# EAGLE board steering_throttle (EAGLE 6.6.0)
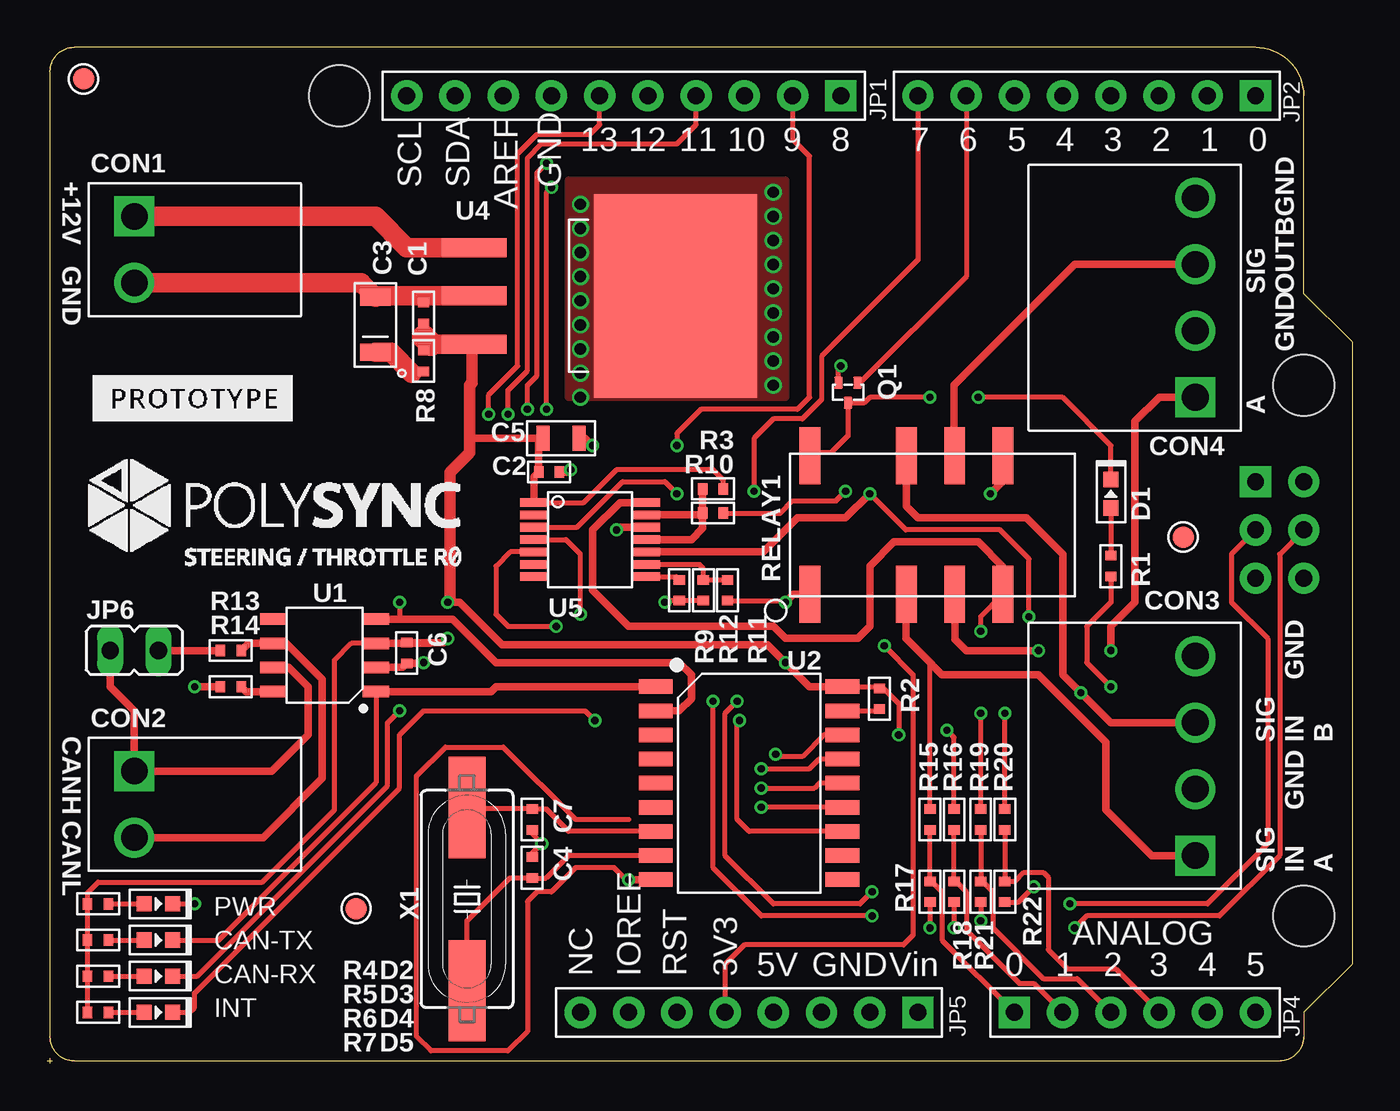
[diagram p0: board, top side]
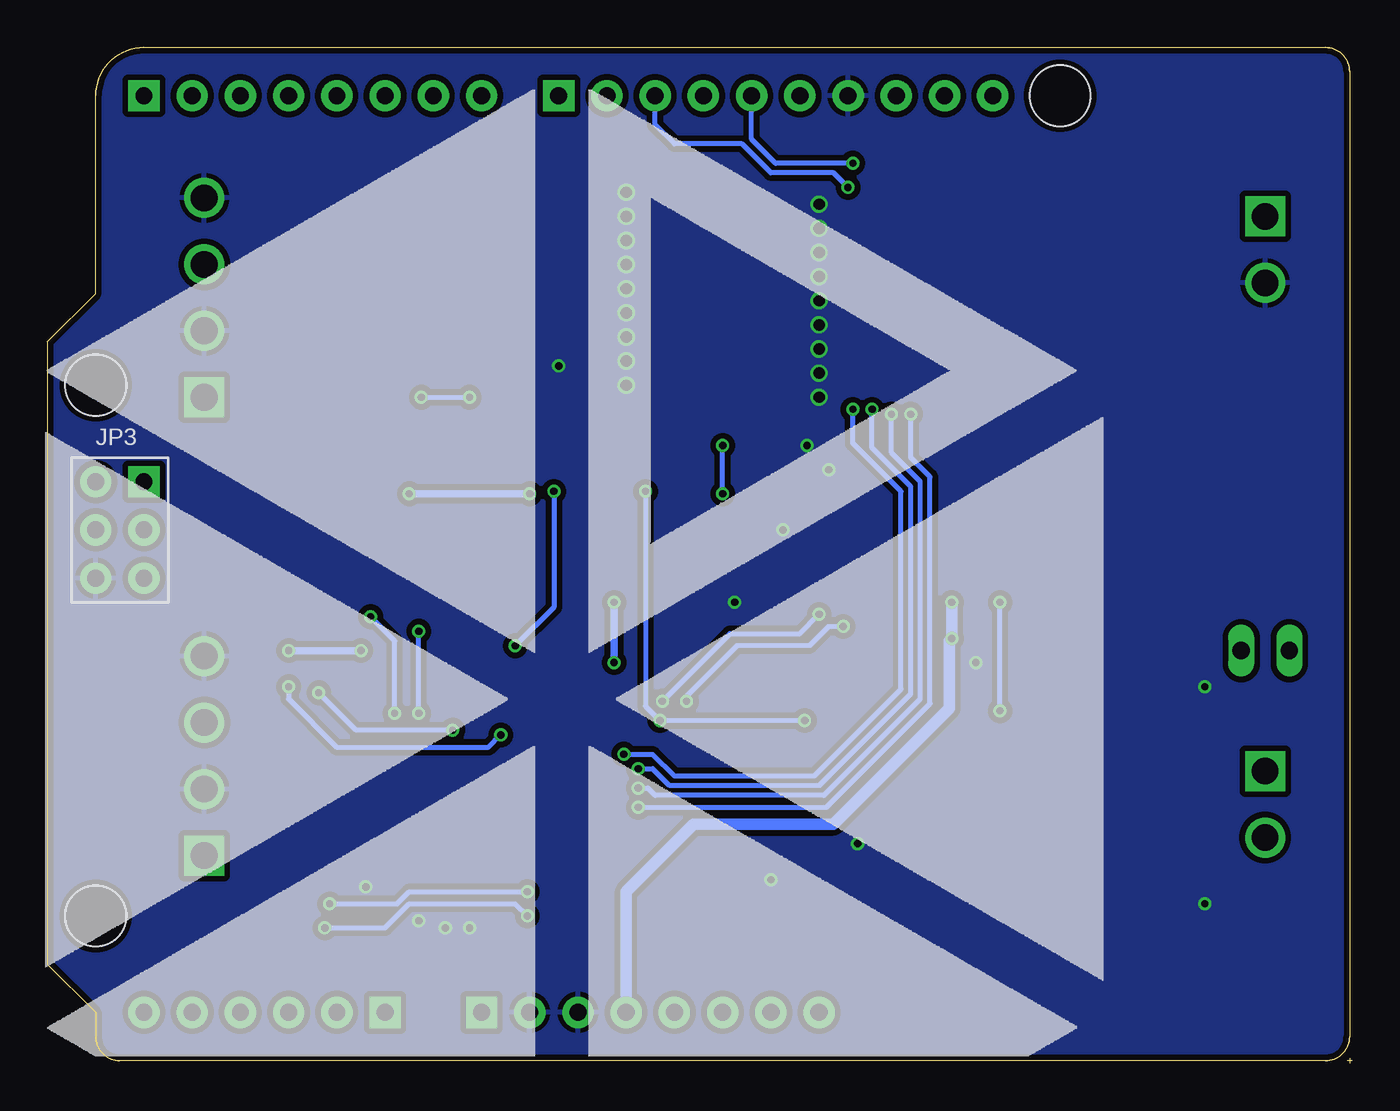
[diagram p1: board, bottom side, seen from below]

Size 68.71 x 53.47 mm. Coordinates in mm from the lower left corner, seen from the top.
Outline: 66.17,1.4 arc-90 64.9,0.13
Outline: 1.4,0.13 arc-90 0.13,1.4
Outline: 0.13,52.2 arc-90 1.4,53.47
Outline: 63.63,53.47 arc-90 66.17,50.93
Outline: 0.13,1.4 arc90 1.4,0.13
Outline: 64.9,0.13 arc90 66.17,1.4
Outline: 1.4,53.47 arc90 0.13,52.2
Outline: 0.13,1.4 arc90 1.4,0.13
Outline: 64.9,0.13 arc90 66.17,1.4
Outline: 66.17,50.93 arc90 63.63,53.47
Outline: 66.17,1.4 66.17,2.67 68.71,5.21 68.71,37.97 66.17,40.51 66.17,50.93
Outline: 66.17,1.4 arc-90 64.9,0.13
Outline: 63.63,53.47 5.21,53.47 1.4,53.47
Outline: 1.4,53.47 arc90 0.13,52.2
Outline: 0.13,52.2 0.13,1.4
Outline: 0.13,1.4 arc90 1.4,0.13
Outline: 66.17,50.93 arc90 63.63,53.47
Outline: 1.4,0.13 64.9,0.13
Outline: 0,0.13 0.25,0.13
Outline: 0.13,0.25 0.13,0
Copper layers (1*16): Top 0.035mm / dielectric 1.5mm / Bottom 0.035mm
Design rules "MF_Standard_2_Layer": minimum track width 6mil, minimum drill 12mil, track to track 6mil, track to pad 6mil, pad to pad 6mil, via to via 6mil, smd to smd 0mil, copper to edge 10mil, drill to drill 10mil, minimum pad ring 6mil, minimum via ring 6mil, stop-mask expansion 2mil, vias tented up to drill 25mil, thermal gap 10mil
Net classes: 0 default: width 0.152 mm, drill 0.305 mm, clearance 0.152 mm

## Footprints (pad centres in the part's own frame; a part is rotated, then mirrored left to right if it is on the bottom)
C0402 = smd 0.5 x 0.6: P$1 -0.55,0; P$2 0.55,0
CP1206 = smd 0.9 x 1.6: P$1 -1.45,0; P$2 1.45,0
C0805 = smd 0.7 x 1.3: P$1 -0.95,0; P$2 0.95,0
PHOENIX_2_45 = drill 1.4 square: P$1 0,0 | drill 1.4: P$2 3.5,0
PHOENIX_4_45 = drill 1.4 square: P$1 0,0 | drill 1.4: P$2 3.5,0; P$3 7,0; P$4 10.5,0
LED0603 = smd 0.8 x 0.8: ANODE 0.75,0; CATHODE -0.75,0
ARDUINO_JP1 = drill 0.889 pad 1.651 square: 9 41.656,50.8 | drill 0.889 pad 1.651: 10 39.116,50.8; 11 36.576,50.8; 12 34.036,50.8; 13 31.496,50.8; 14 28.956,50.8; 15 26.416,50.8; 16 23.876,50.8; 17 21.336,50.8; 18 18.796,50.8 | hole 3.2: 15.24,50.8
ARDUINO_JP2 = drill 0.889 pad 1.651 square: 1 63.5,50.8 | drill 0.889 pad 1.651: 2 60.96,50.8; 3 58.42,50.8; 4 55.88,50.8; 5 53.34,50.8; 6 50.8,50.8; 7 48.26,50.8; 8 45.72,50.8
ARDUINO_JP3 = drill 0.889 pad 1.651 square: 33 63.5,30.48 | drill 0.889 pad 1.651: 34 63.5,27.94; 35 63.5,25.4; 36 66.04,25.4; 37 66.04,27.94; 38 66.04,30.48 | hole 3.2: 66.04,35.56; 66.04,7.62
ARDUINO_JP4 = drill 0.889 pad 1.651 square: 27 50.8,2.54 | drill 0.889 pad 1.651: 28 53.34,2.54; 29 55.88,2.54; 30 58.42,2.54; 31 60.96,2.54; 32 63.5,2.54
ARDUINO_JP5 = drill 0.889 pad 1.651: 19 27.94,2.54; 20 30.48,2.54; 21 33.02,2.54; 22 35.56,2.54; 23 38.1,2.54; 24 40.64,2.54; 25 43.18,2.54 | drill 0.889 pad 1.651 square: 26 45.72,2.54
JP1 = drill 0.914 long: 1 0,-1.27; 2 0,1.27
EMT3F = smd 0.46 x 0.65: P$1 -0.5,0; P$2 0.5,0; P$3 0,1.05
R0402 = smd 0.5 x 0.6: P$1 -0.55,0; P$2 0.55,0
KEMET_EE2 = smd 1.1 x 3: P$1 -6.45,-3.645; P$3 -1.37,-3.645; P$4 1.17,-3.645; P$5 3.71,-3.645; P$8 3.71,3.645; P$9 1.17,3.645; P$10 -1.37,3.645; P$12 -6.45,3.645
TP_4545 = smd 1.143 x 1.143: T 0,0
SOIC8-6.0 = smd 0.6 x 1.4: 1 -1.905,-2.7; 2 -0.635,-2.7; 3 0.635,-2.7; 4 1.905,-2.7; 5 1.905,2.7; 6 0.635,2.7; 7 -0.635,2.7; 8 -1.905,2.7
SOIC18 = smd 0.762 x 1.778: 1 -5.08,-4.915; 2 -3.81,-4.915; 3 -2.54,-4.915; 4 -1.27,-4.915; 5 0,-4.915; 6 1.27,-4.915; 7 2.54,-4.915; 8 3.81,-4.915; 9 5.08,-4.915; 10 5.08,4.915; 11 3.81,4.915; 12 2.54,4.915; 13 1.27,4.915; 14 0,4.915; 15 -1.27,4.915; 16 -2.54,4.915; 17 -3.81,4.915; 18 -5.08,4.915
TO-263 = smd 1 x 3.4: P$1 -2.54,0; P$2 0,0; P$3 2.54,0 | smd 10.7 x 8.6: P$4 0,10.6
TSSOP-14 = smd 1.45 x 0.45: P$1 -2.95,1.95; P$2 -2.95,1.3; P$3 -2.95,0.65; P$4 -2.95,0; P$5 -2.95,-0.65; P$6 -2.95,-1.3; P$7 -2.95,-1.95; P$8 2.95,-1.95; P$9 2.95,-1.3; P$10 2.95,-0.65; P$11 2.95,0; P$12 2.95,0.65; P$13 2.95,1.3; P$14 2.95,1.95
HC49UP = smd 5.334 x 1.93: 1 -4.826,0; 2 4.826,0

## Placement (x,y rotation side)
C1  .1u  [C0402]  19.81,39.5 90 top
C2  .1u  [C0402]  26.42,31.11 0 top
C3  33u  [CP1206]  17.27,38.86 90 top
C4  22p  [C0402]  25.53,10.29 270 top
C5  10u  [C0805]  27.05,32.89 0 top
C6  .1u  [C0402]  18.92,21.59 270 top
C7  22p  [C0402]  25.53,12.83 90 top
CON1  CON2  [PHOENIX_2_45]  4.57,44.58 270 top
CON2  CON2  [PHOENIX_2_45]  4.57,15.37 270 top
CON3  CON4  [PHOENIX_4_45]  60.45,10.92 90 top
CON4  CON4  [PHOENIX_4_45]  60.45,35.05 90 top
D1  [LED0603]  56.01,29.97 270 top
D2  [LED0603]  5.84,8.38 180 top
D3  [LED0603]  5.84,6.48 180 top
D4  [LED0603]  5.84,4.57 180 top
D5  [LED0603]  5.84,2.67 180 top
JP1  ARDUINO_JP1  [ARDUINO_JP1]  0.13,0.13 0 top
JP2  ARDUINO_JP2  [ARDUINO_JP2]  0.13,0.13 0 top
JP3  ARDUINO_JP3  [ARDUINO_JP3]  0.13,0.13 0 top
JP4  ARDUINO_JP4  [ARDUINO_JP4]  0.13,0.13 0 top
JP5  ARDUINO_JP5  [ARDUINO_JP5]  0.13,0.13 0 top
JP6  [JP1]  4.57,21.72 270 top
Q1  RE1C002UN  [EMT3F]  42.16,35.81 180 top
R1  1k  [R0402]  56.01,26.16 270 top
R2  10k  [R0402]  43.82,19.18 270 top
R3  0  [R0402]  35.05,30.23 180 top
R4  1k  [R0402]  2.67,8.38 180 top
R5  1k  [R0402]  2.67,6.48 180 top
R6  1k  [R0402]  2.67,4.57 180 top
R7  1k  [R0402]  2.67,2.67 180 top
R8  .3  [R0402]  19.81,36.96 270 top
R9  10k  [R0402]  33.27,24.89 270 top
R10  DNP  [R0402]  35.05,28.96 180 top
R11  10k  [R0402]  35.81,24.89 90 top
R12  DNP  [R0402]  34.54,24.89 270 top
R13  120  [R0402]  9.65,21.72 180 top
R14  47k  [R0402]  9.65,19.81 180 top
R15  0  [R0402]  46.48,12.83 270 top
R16  0  [R0402]  47.75,12.83 270 top
R17  DNP  [R0402]  46.48,9.02 270 top
R18  DNP  [R0402]  47.75,9.02 270 top
R19  0  [R0402]  49.15,12.83 270 top
R20  0  [R0402]  50.42,12.83 270 top
R21  DNP  [R0402]  49.15,9.02 270 top
R22  DNP  [R0402]  50.42,9.02 270 top
RELAY1  RELAY_DPDT  [KEMET_EE2]  46.61,28.32 0 top
TP1  [TP_4545]  16.26,8.13 0 top
TP2  [TP_4545]  59.82,27.69 0 top
TP3  [TP_4545]  1.91,51.82 0 top
U1  MCP2551  [SOIC8-6.0]  14.61,21.46 90 top
U2  MCP2515  [SOIC18]  36.96,14.73 270 top
U4  TL750M  [TO-263]  22.48,40.39 270 top
U5  MCP4922T  [TSSOP-14]  28.57,27.56 0 top
U$1  [POLYSYNC_STEERING_BOT]  0.64,0.38 0 top
U$2  [POLYSYNC_STEERING_TOP_R0]  -0.64,21.21 0 top
X1  16MHz  [HC49UP]  22.1,8.64 90 top

## Library data of the parts
C1 C2 C4-C7 R1-R22 = MF_Passives; POPULATE: 1
C3 = MF_Passives
CON1-CON4 U4 U5 U$1 U$2 = polysync
D1-D5 = MF_LEDs; HOUSEPART: NO; POPULATE: 1
JP1-JP5 = polysync_steering_throttle
JP6 = jumper
Q1 = BTLE_widget
RELAY1 = polysync; PARTNO: EE2-5NU-L
TP1-TP3 = Discrete; PARTNO: DNP
U1 U2 = IC
X1 = Discrete

## Nets
+3V3: JP5.22 R10.P$1
+5V: C1.P$1 C2.P$1 C5.P$1 C6.P$1 JP5.23 R1.P$2 R2.P$1 R3.P$1 R4.P$2 R5.P$2 R6.P$2 R7.P$2 R8.P$1 R11.P$1 RELAY1.P$1 U1.3 U2.18 U4.P$3 U5.P$1
ADC0: JP4.27 R15.P$2 R17.P$1
ADC1: JP4.28 R16.P$2 R18.P$1
ADC2: JP4.29 R19.P$2 R21.P$1
ADC3: JP4.30 R20.P$2 R22.P$1
ADC4: JP4.31
ADC5: JP4.32
ADC6: JP5.19
ADC7: JP5.20
CANH: CON2.P$1 JP6.1 U1.7
CANL: CON2.P$2 R13.P$1 U1.6
CS_A: JP1.10 U5.P$3
CS_B: JP1.11 U2.16
GND: C1.P$2 C2.P$2 C3.P$2 C4.P$1 C5.P$2 C6.P$2 C7.P$1 CON1.P$2 CON3.P$2 CON3.P$4 CON4.P$2 CON4.P$4 D2.CATHODE JP1.15 JP3.36 JP5.24 JP5.25 Q1.P$2 R9.P$2 R12.P$2 R14.P$2 R17.P$2 R18.P$2 R21.P$2 R22.P$2 U1.2 U2.9 U4.P$2 U4.P$4 U5.P$12
INT: D5.CATHODE JP2.8 U2.12
IO0: JP2.1
IO1: JP2.2
IO2: JP2.3
IO3: JP2.4
IO4: JP2.5
IO5: JP2.6
IO8: JP1.9
LDAC: R9.P$1 U5.P$8
MISO_A: JP3.33
MISO_B: JP1.13 U2.15
MOSI_A: JP3.37 U5.P$5
MOSI_B: JP1.12 U2.14
N$1: D3.ANODE R5.P$1
N$2: JP6.2 R13.P$2
N$3: D1.CATHODE Q1.P$3 RELAY1.P$12
N$4: C3.P$1 R8.P$2
N$5: D4.ANODE R6.P$1
N$6: D2.ANODE R4.P$1
N$7: R3.P$2 R10.P$2 U5.P$11 U5.P$13
N$8: D5.ANODE R7.P$1
N$9: R14.P$1 U1.8
N$10: D1.ANODE R1.P$1
N$16: C7.P$2 U2.7 X1.2
N$17: C4.P$2 U2.8 X1.1
REF: JP1.16
RST: JP5.21
RST_N: R2.P$2 U2.17
RX_CAN: D4.CATHODE U1.4 U2.2
SCK_A: JP3.34 U5.P$4
SCK_B: JP1.14 U2.13
SHDN: R11.P$2 R12.P$1 U5.P$9
SIGNAL_INPUT_A: CON3.P$1 R15.P$1 RELAY1.P$3
SIGNAL_INPUT_B: CON3.P$3 R16.P$1 RELAY1.P$10
SIGNAL_OUTPUT_A: CON4.P$1 RELAY1.P$4
SIGNAL_OUTPUT_B: CON4.P$3 RELAY1.P$9
SPOOF_EN: JP2.7 Q1.P$1
SPOOF_SIGNAL_A: R19.P$1 RELAY1.P$5 U5.P$14
SPOOF_SIGNAL_B: R20.P$1 RELAY1.P$8 U5.P$10
TX_CAN: D3.CATHODE U1.1 U2.1
V+: CON1.P$1 U4.P$1
VIN: JP5.26

## Tracks (layer width: path | path; a pad name or v marks a point on that pad's centre or on a via)
+3V3  (via drill 0.38)
  Top 0.254: R10.P$1 38.61,28.96 39.24,29.59 41.53,29.59 v42.04,30.1 | v44.07,21.97 45.59,20.45 45.59,6.73 45.09,6.22 36.7,6.22 35.69,5.21 JP5.22
  Bottom 0.254: v42.04,30.1 42.04,24 v44.07,21.97
+5V  (via drill 0.38)
  Top 0.254: C1.P$1 19.81,38.23 | R8.P$1 19.85,37.51 20.19,37.85 | U2.18 43.73,19.81 R2.P$1 44.03,19.73 44.83,18.92 v44.83,17.27 | R7.P$2 R6.P$2 R5.P$2 R4.P$2 2.12,8.98 2.67,9.53 11.3,9.53 15.11,13.34 15.11,21.21 16,22.1 U1.3 | R1.P$2 56.01,24.26 54.74,22.99 54.74,21.08 v56.01,19.81 | R3.P$1 35.6,30.69 35.05,31.24 29.97,31.24 28.24,29.51 U5.P$1 | R11.P$1 38.78,24.34 v38.86,24.26
  Top 0.406: U1.3 20.15,22.1 C6.P$1 20.87,22.14 v21.08,22.35 | 22.35,37.72 U4.P$3 | 22.22,32.89 C5.P$1 25.87,32.66 C2.P$1 25.62,30.87 U5.P$1 | v21.08,24.26 21.72,24.26 23.94,22.03 37.91,22.03 v38.86,21.08 40.13,19.81 U2.18 | RELAY1.P$1 39.28,24.68 v38.86,24.26
  Top 0.61: 22.35,37.72 22.35,35.81 22.22,35.69 22.22,32.89 22.22,32.13 21.21,31.11 21.21,24.38 v21.08,24.26
  Top 1.016: U4.P$3 20.19,37.85
  Top 1.27: 20.19,37.85 19.81,38.23
  Bottom 0.254: v56.01,19.81 56.01,19.18 53.47,16.64 45.47,16.64 v44.83,17.27
  Bottom 0.406: v38.86,24.26 v38.86,21.08
  Bottom 0.61: JP5.23 38.23,9.02 34.67,12.57 27.3,12.57 21.21,18.67 21.21,22.22 v21.08,22.35 v21.08,24.26
ADC0
  Top 0.254: R15.P$2 R17.P$1 46.57,9.57 47.12,9.02 47.12,6.48 JP4.27
ADC1
  Top 0.254: R16.P$2 R18.P$1 47.84,9.57 48.39,9.02 48.39,6.98 51.18,4.19 51.94,4.19 JP4.28
ADC2
  Top 0.254: JP4.29 54.23,4.44 52.45,4.44 49.78,7.11 49.78,9.02 49.23,9.57 R21.P$1 R19.P$2
ADC3
  Top 0.254: R20.P$2 R22.P$1 50.97,9.57 51.44,10.03 52.45,10.03 52.71,9.78 52.71,5.97 53.72,4.95 56.26,4.95 JP4.30
CANH
  Top 0.406: U1.7 12.7,20.83 13.72,19.81 13.72,17.27 11.81,15.37 CON2.P$1 4.57,18.54 3.3,19.81 JP6.1
CANL
  Top 0.406: CON2.P$2 11.36,11.87 14.48,14.99 14.48,20.19 12.57,22.1 U1.6 10.58,22.1 R13.P$1
CS_A  (via drill 0.38)
  Top 0.254: U5.P$3 27.89,28.21 30.29,30.61 32.51,30.61 v33.15,29.97 | JP1.10 39.24,48.64 40.13,47.75 40.13,35.05 39.5,34.42 34.42,34.42 33.15,33.15 v33.15,32.51
  Bottom 0.254: v33.15,29.97 v33.15,32.51
CS_B  (via drill 0.38)
  Top 0.254: v26.29,34.42 26.29,45.85 v26.54,46.1 | U2.16 40.89,17.27 39.75,16.13 38.48,16.13 v38.35,16.26
  Bottom 0.254: v38.35,16.26 36.83,16.26 35.69,15.11 28.32,15.11 23.75,19.68 23.75,30.1 26.29,32.64 v26.29,34.42 | v26.54,46.1 27.3,46.86 30.61,46.86 32.13,48.39 35.69,48.39 36.7,49.4 JP1.11
GND  (via drill 0.38, 0.6)
  Top 0.254: C1.P$2 19.81,40.39 | D2.CATHODE v7.75,8.38 | v32.51,24.26 32.6,24.34 R9.P$2 R12.P$2 | R18.P$2 v47.75,7.11 | R17.P$2 v46.48,7.11 | 19.77,21.04 v19.81,21.08 | C7.P$1 25.53,12.07 v26.04,11.56 25.53,11.05 C4.P$1 | v30.61,9.65 30.48,9.65 29.84,10.29 27.81,10.29 26.54,9.02 25.78,9.02 25.27,8.51 25.27,1.65 24.26,0.64 20.19,0.64 19.43,1.4 19.43,15.11 20.95,16.64 24,16.64 27.81,12.83 30.61,12.83 | Q1.P$2 41.66,36.58 v41.78,36.7 | R21.P$2 v49.15,7.49 | R22.P$2 51.14,8.47 v51.94,9.27
  Top 0.406: R14.P$2 v7.75,19.81 | 19.77,21.04 C6.P$2 18.71,20.83 U1.2 | U2.9 v30.61,9.65 | U5.P$12 30.11,28.21 v29.97,28.07 | C2.P$2 27.43,31.11 v27.56,31.24 | C5.P$2 28.32,32.89 v28.7,32.51
  Top 1.016: CON1.P$2 16.51,41.08 C3.P$2 17.35,40.39 19.81,40.39 U4.P$2
  other vias: 38.23,44.58 38.23,43.31 38.23,42.04 38.23,40.77 38.23,39.5 38.23,38.23 38.23,36.96 38.23,35.69 28.07,45.21 28.07,43.94 28.07,42.67 28.07,41.4 28.07,40.13 28.07,38.86 28.07,37.59 28.07,36.32 28.07,35.05 38.23,45.85
  pour Bottom (isolate 0.305): 0.13,53.47 0.13,0.13 68.71,0.13 68.71,53.47
  pour Top (no thermals): 27.43,46.48 27.43,35.05 38.86,35.05 38.86,46.48
INT  (via drill 0.38)
  Top 0.254: U2.12 36.96,12.19 36.32,12.83 36.32,17.91 v36.45,18.03 | v28.83,18.03 28.32,18.54 19.81,18.54 18.54,17.27 18.54,14.48 7.75,3.68 7.75,2.92 7.49,2.67 D5.CATHODE | JP2.8 45.85,42.29 40.77,37.21 40.77,34.93 39.75,33.91 38.23,33.91 37.21,32.89 v37.21,30.1
  Bottom 0.254: v28.83,18.03 v36.45,18.03 37.21,18.8 v37.21,30.1
LDAC
  Top 0.254: U5.P$8 33.11,25.61 R9.P$1
MISO_B  (via drill 0.38)
  Top 0.254: v37.59,15.49 40.13,15.49 40.64,16 U2.15 | v25.27,34.42 25.27,35.69 25.78,36.2 25.78,46.86 v26.29,47.37
  Bottom 0.254: v25.27,34.42 25.27,32.39 23.24,30.35 23.24,19.43 28.07,14.61 35.94,14.61 36.83,15.49 v37.59,15.49 | v26.29,47.37 30.35,47.37 31.62,48.64 JP1.13
MOSI_A  (via drill 0.38)
  Top 0.254: JP3.37 64.9,26.8 64.9,10.92 61.72,7.75 54.74,7.75 v54.1,7.11 | v43.43,7.75 37.59,7.75 35.05,10.29 v35.05,19.05 | U5.P$5 24.37,26.91 23.62,26.16 23.62,23.62 24.26,22.99 v26.8,22.99
  Bottom 0.254: v54.1,7.11 50.93,7.11 49.66,8.38 44.07,8.38 v43.43,7.75 | v26.8,22.99 27.56,22.99 28.57,21.97 32.39,21.97 35.05,19.3 v35.05,19.05
MOSI_B  (via drill 0.38)
  Top 0.254: v37.59,14.48 40.39,14.48 40.64,14.73 U2.14 | v24.26,34.16 24.26,35.43 25.27,36.45 25.27,47.62 26.04,48.39 33.15,48.39 34.16,49.4 JP1.12
  Bottom 0.254: v24.26,34.16 24.26,32.13 22.73,30.61 22.73,19.18 27.81,14.1 36.7,14.1 37.08,14.48 v37.59,14.48
N$1
  Top 0.254: R5.P$1 D3.ANODE
N$2
  Top 0.406: R13.P$2 JP6.2
N$3  (via drill 0.38)
  Top 0.254: 40.39,32.19 RELAY1.P$12 40.32,32.13 41.28,32.13 42.16,33.02 Q1.P$3 43.02,34.76 43.31,35.05 v46.48,35.05 | D1.CATHODE 56.01,32.51 53.47,35.05 v49.02,35.05
  Bottom 0.254: v49.02,35.05 v46.48,35.05
N$4
  Top 0.254: 19.18,36.32 19.73,36.32 R8.P$2
  Top 1.016: C3.P$1 18.09,37.41 19.18,36.32
N$5
  Top 0.254: R6.P$1 D4.ANODE
N$6
  Top 0.254: R4.P$1 D2.ANODE
N$7
  Top 0.406: U5.P$13 34.41,28.86 R10.P$2 | R10.P$2 R3.P$2 | U5.P$11 33.91,27.56 34.5,28.15 R10.P$2
N$8
  Top 0.254: R7.P$1 D5.ANODE
N$9
  Top 0.406: U1.8 10.46,19.56 R14.P$1
N$10
  Top 0.254: D1.ANODE R1.P$1
N$16
  Top 0.254: U2.7 27.43,12.19 26.25,13.38 C7.P$2 22.18,13.38 X1.2
N$17
  Top 0.254: U2.8 27.43,10.92 26.25,9.74 C4.P$2 24.34,9.74 22.1,7.49 X1.1
RST_N
  Top 0.254: U2.17 43.73,18.54 R2.P$2
RX_CAN  (via drill 0.38)
  Top 0.254: v18.54,18.54 17.91,17.91 17.91,14.61 7.87,4.57 D4.CATHODE | v18.54,24.26 18.54,23.37
  Top 0.406: U2.2 33.27,18.54 33.91,19.18 33.91,20.45 33.27,21.08 23.62,21.08 21.34,23.37 18.54,23.37 U1.4
  Bottom 0.254: v18.54,18.54 v18.54,24.26
SCK_A  (via drill 0.38)
  Top 0.254: JP3.34 62.36,26.8 62.36,24.26 64.26,22.35 64.26,11.56 61.09,8.38 v53.85,8.38 | v43.43,9.02 42.8,8.38 38.23,8.38 35.69,10.92 35.69,18.41 v36.32,19.05 | U5.P$4 27.3,27.56 28.07,26.8 v28.07,23.62
  Bottom 0.254: v53.85,8.38 50.29,8.38 49.66,9.02 v43.43,9.02 | v28.07,23.62 29.08,22.61 32.77,22.61 v36.32,19.05
SCK_B  (via drill 0.38)
  Top 0.254: U2.13 v37.59,13.46 | v23.24,34.16 23.24,35.18 24.77,36.7 24.77,47.88 25.78,48.9 28.57,48.9 29.08,49.4 JP1.14
  Bottom 0.254: v37.59,13.46 27.69,13.46 22.22,18.92 22.22,30.86 23.24,31.88 v23.24,34.16
SHDN
  Top 0.254: U5.P$9 34.32,26.26 34.54,26.04 R12.P$1 R11.P$2
SIGNAL_INPUT_A
  Top 0.254: R15.P$1 46.48,21.08 46.1,21.46
  Top 0.406: RELAY1.P$3 45.21,24.65 45.21,22.35 46.1,21.46 47.12,20.45 52.2,20.45 55.75,16.89 55.75,13.34 58.17,10.92 CON3.P$1
SIGNAL_INPUT_B  (via drill 0.38)
  Top 0.254: R16.P$1 47.75,17.14 v47.37,17.53
  Top 0.406: RELAY1.P$10 45.24,29.31 45.85,28.7 51.56,28.7 53.47,26.8 53.47,20.45 v54.42,19.49 55.99,17.92 CON3.P$3
  Bottom 0.254: v47.37,17.53 52.45,17.53 v54.42,19.49
SIGNAL_OUTPUT_A  (via drill 0.38)
  Top 0.406: RELAY1.P$4 47.78,22.32 48.39,21.72 v52.2,21.72 | v56.01,21.72 56.01,22.99 57.28,24.26 57.28,33.78 58.55,35.05 CON4.P$1
  Bottom 0.406: v56.01,21.72 v52.2,21.72
SIGNAL_OUTPUT_B
  Top 0.406: CON4.P$3 54.12,42.05 47.75,35.69 47.75,31.99 RELAY1.P$9
SPOOF_EN
  Top 0.254: JP2.7 48.39,41.4 42.8,35.81 Q1.P$1
SPOOF_SIGNAL_A  (via drill 0.38)
  Top 0.254: R19.P$1 v49.15,18.41 | v49.15,22.73 49.15,23.51 RELAY1.P$5
  Top 0.406: U5.P$14 30.14,29.51 28.7,28.07 28.7,24.89 30.61,22.99 38.23,22.99 38.86,22.35 42.67,22.35 43.31,22.99 43.31,26.16 44.58,27.43 49.02,27.43 50.32,26.13 RELAY1.P$5
  Bottom 0.254: v49.15,18.41 v49.15,22.73
SPOOF_SIGNAL_B  (via drill 0.38)
  Top 0.254: R20.P$1 v50.42,18.41 | v51.69,23.49 51.69,26.54 50.16,28.07 45.21,28.07 v43.31,29.97
  Top 0.406: U5.P$10 37.7,26.91 39.5,28.7 42.04,28.7 v43.31,29.97 | RELAY1.P$8 50.32,30.63 v49.66,29.97
  Bottom 0.254: v50.42,18.41 50.42,22.22 v51.69,23.49
  Bottom 0.406: v43.31,29.97 v49.66,29.97
TX_CAN
  Top 0.254: D3.CATHODE 9.02,6.48 17.3,14.77 U1.1
  Top 0.406: U1.1 23.37,19.56 23.62,19.81 U2.1
V+
  Top 1.016: CON1.P$1 17.27,44.58 18.92,42.93 U4.P$1

## Text on the board
tPlace: +12V | GND | GND | SIG / OUTB | GND | A | GND | CANH | SIG / IN / B | CANL | GND | SIG / IN / A | PWR | CAN-TX | CAN-RX | INT